# EAGLE board Si4707-Breakout-Panel-v11 (EAGLE 6.3), part 1 of 3
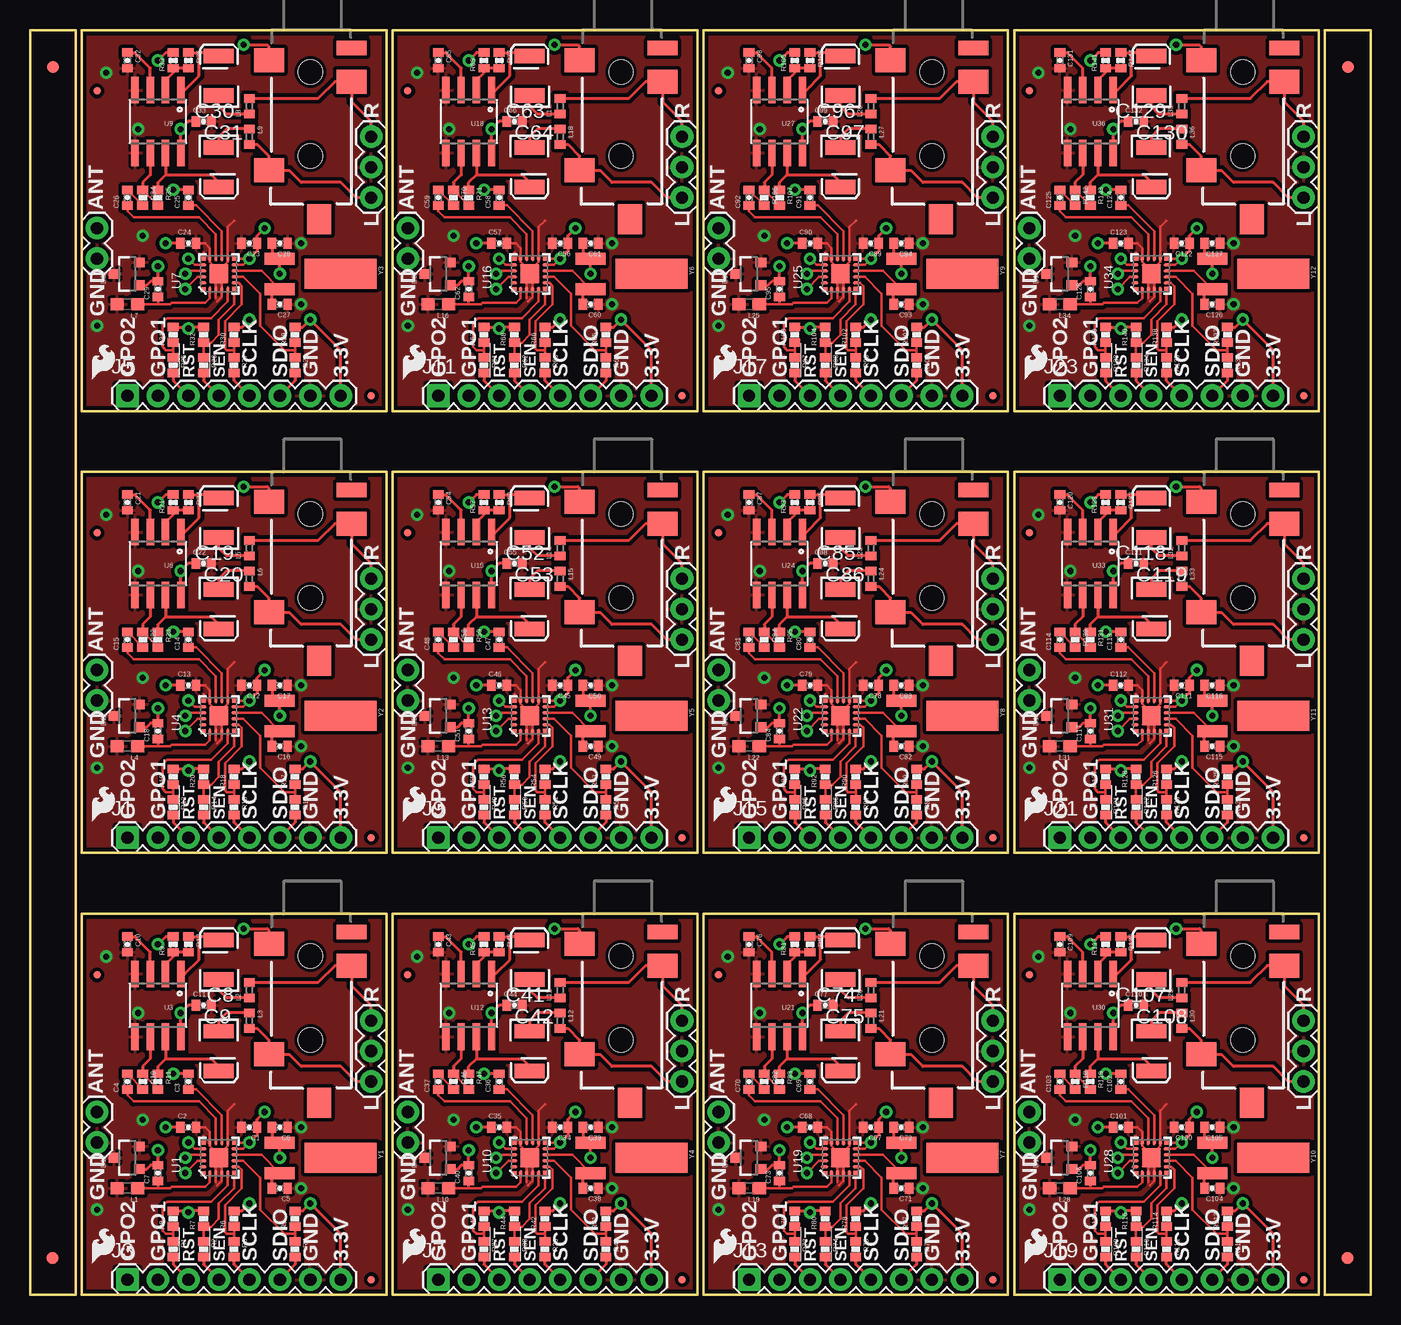
[diagram p0: board, top side]
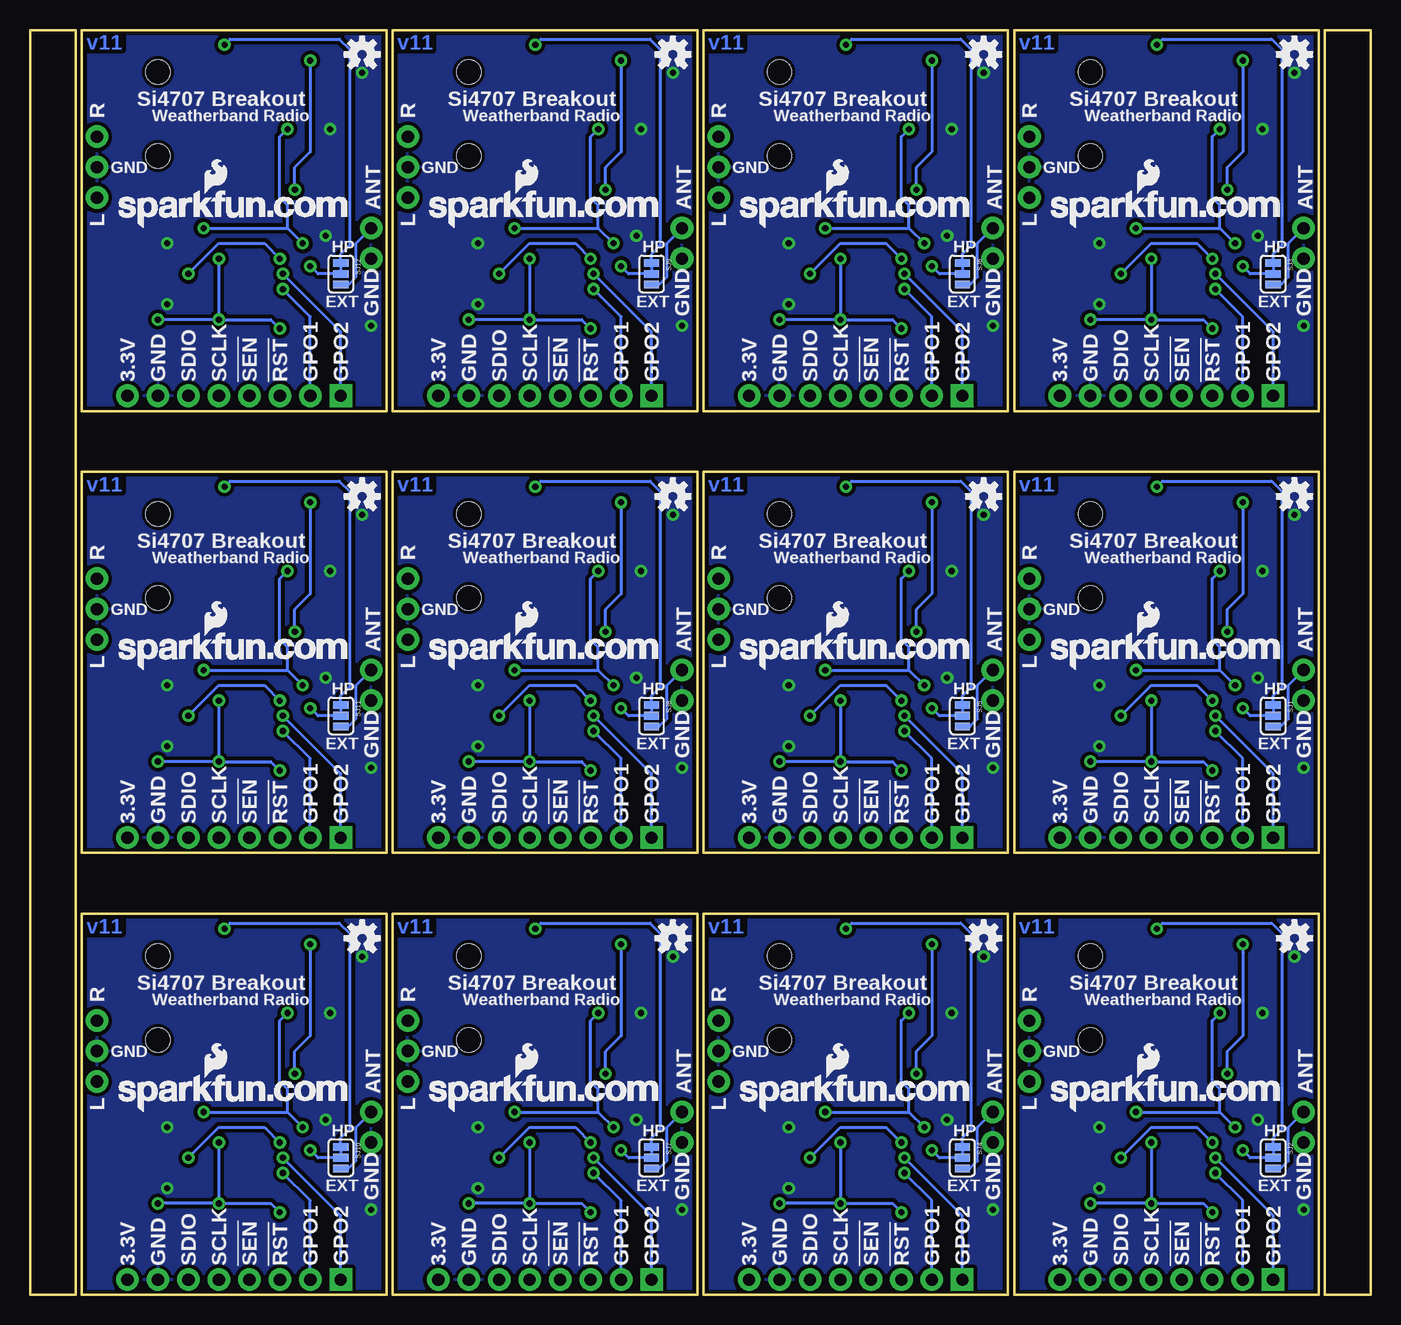
[diagram p1: board, bottom side, seen from below]

Size 111.76 x 105.41 mm. Coordinates in mm from the lower left corner, seen from the top.
Outline: 3.81,2.54 3.81,21.59
Outline: 3.81,21.59 3.81,88.9
Outline: 3.81,21.59 3.81,0 0,0 0,22.86
Outline: 0,102.87 0,83.82
Outline: 0,83.82 0,16.51
Outline: 0,83.82 0,105.41 3.81,105.41 3.81,82.55
Outline: 107.95,102.87 107.95,83.82
Outline: 107.95,83.82 107.95,16.51
Outline: 107.95,83.82 107.95,105.41 111.76,105.41 111.76,82.55
Outline: 111.76,2.54 111.76,21.59
Outline: 111.76,21.59 111.76,88.9
Outline: 111.76,21.59 111.76,0 107.95,0 107.95,22.86
Outline: 4.32,0 4.32,31.75 29.72,31.75 29.72,0 4.32,0
Outline: 4.32,36.83 4.32,68.58 29.72,68.58 29.72,36.83 4.32,36.83
Outline: 4.32,73.66 4.32,105.41 29.72,105.41 29.72,73.66 4.32,73.66
Outline: 30.23,0 30.23,31.75 55.63,31.75 55.63,0 30.23,0
Outline: 30.23,36.83 30.23,68.58 55.63,68.58 55.63,36.83 30.23,36.83
Outline: 30.23,73.66 30.23,105.41 55.63,105.41 55.63,73.66 30.23,73.66
Outline: 56.13,0 56.13,31.75 81.53,31.75 81.53,0 56.13,0
Outline: 56.13,36.83 56.13,68.58 81.53,68.58 81.53,36.83 56.13,36.83
Outline: 56.13,73.66 56.13,105.41 81.53,105.41 81.53,73.66 56.13,73.66
Outline: 82.04,0 82.04,31.75 107.44,31.75 107.44,0 82.04,0
Outline: 82.04,36.83 82.04,68.58 107.44,68.58 107.44,36.83 82.04,36.83
Outline: 82.04,73.66 82.04,105.41 107.44,105.41 107.44,73.66 82.04,73.66
Copper layers (1*16): Top 0.035mm / dielectric 1.5mm / Bottom 0.035mm
Design rules "default": minimum track width 8mil, minimum drill 20mil, track to track 8mil, track to pad 8mil, pad to pad 8mil, via to via 8mil, smd to smd 8mil, copper to edge 8mil, drill to drill 8mil, minimum pad ring 12mil, minimum via ring 10mil, stop-mask expansion 4mil, vias tented up to drill 20mil, thermal gap 10mil

## Footprints (pad centres in the part's own frame; a part is rotated, then mirrored left to right if it is on the bottom)
0402-CAP = smd 0.7 x 0.9: 1 -0.65,0; 2 0.65,0
EIA3528 = smd 1.2 x 2.5: A 1.65,0; C -1.65,0
SOT23-3 = smd 0.8 x 0.9: 1 -0.95,-1; 2 0.95,-1; 3 0,1.1
FIDUCIAL-1X2 = smd 1 x 1: 1 0,0
1X08 = drill 1.016 pad 1.88 square: 1 0,0 | drill 1.016 pad 1.88: 2 2.54,0; 3 5.08,0; 4 7.62,0; 5 10.16,0; 6 12.7,0; 7 15.24,0; 8 17.78,0
1X02 = drill 1.016 pad 1.88: 1 0,0; 2 2.54,0
1X03 = drill 1.016 pad 1.88: 1 0,0; 2 2.54,0; 3 5.08,0
MICRO-FIDUCIAL = smd 0.635 x 0.635: 1 0,0
0603 = smd 1.1 x 1: 1 -0.85,0; 2 0.85,0
C0402 = smd 0.7 x 0.9: 1 -0.65,0; 2 0.65,0
0402-RES = smd 0.7 x 0.9: 1 -0.65,0; 2 0.65,0
SJ_3 = smd 0.635 x 1.27: 1 -0.889,0; 2 0,0; 3 0.889,0
SI470X = smd 0.34 x 0.34: 1 -1.275,1.265; 6 -1.265,-1.265; 11 1.265,-1.265; 16 1.265,1.265 | smd 0.61 x 0.28: 2 -1.335,0.75; 3 -1.335,0.25; 4 -1.335,-0.25; 5 -1.335,-0.75; 12 1.335,-0.75; 13 1.335,-0.25; 14 1.335,0.25; 15 1.335,0.75 | smd 0.28 x 0.61: 7 -0.75,-1.335; 8 -0.25,-1.335; 9 0.25,-1.335; 10 0.75,-1.335; 17 0.75,1.335; 18 0.25,1.335; 19 -0.25,1.335; 20 -0.75,1.335 | smd 1.6 x 1.6: 21 0,0
AUDIO-JACK-3.5MM-SMD = smd 2 x 2.5: RING 4.3,3.45; SLEEVE 2.5,-3.45; TIP 11.7,-3.45 | smd 1.2 x 2.5: RSH 1.5,3.45 | smd 2.5 x 2: TSH 15.75,0.75 | hole 2: 3.5,0; 10.5,0
SPARKFUN_SO08 = smd 0.61 x 2.21: 1 -1.905,-2.616; 2 -0.635,-2.616; 3 0.635,-2.616; 4 1.905,-2.616; 5 1.905,2.616; 6 0.635,2.616; 7 -0.635,2.616; 8 -1.905,2.616
CRYSTAL-32KHZ-SMD = smd 2.5 x 6: SHEILD 0,5.08 | smd 1 x 2.5: X1 -1.27,0; X2 1.27,0

## Placement (x,y rotation side)
C1  22nF  [0402-CAP]  18.29,13.97 180 top
C2  0.1uF  [0402-CAP]  13.21,13.97 0 top
C3  0.39uF  [0402-CAP]  13.21,17.78 90 top
C4  0.39uF  [0402-CAP]  8.13,17.78 90 top
C5  22pF  [0402-CAP]  20.83,8.89 180 top
C6  22pF  [0402-CAP]  20.83,13.97 180 top
C7  1nF  [0402-CAP]  10.67,10.16 90 top
C8  47uF  [EIA3528]  15.75,27.94 90 top
C9  47uF  [EIA3528]  15.75,20.32 270 top
C10  0.1uF  [0402-CAP]  8.13,29.21 270 top
C11  0.1uF  [0402-CAP]  14.48,24.13 0 top
C12  22nF  [0402-CAP]  18.29,50.8 180 top
C13  0.1uF  [0402-CAP]  13.21,50.8 0 top
C14  0.39uF  [0402-CAP]  13.21,54.61 90 top
C15  0.39uF  [0402-CAP]  8.13,54.61 90 top
C16  22pF  [0402-CAP]  20.83,45.72 180 top
C17  22pF  [0402-CAP]  20.83,50.8 180 top
C18  1nF  [0402-CAP]  10.67,46.99 90 top
C19  47uF  [EIA3528]  15.75,64.77 90 top
C20  47uF  [EIA3528]  15.75,57.15 270 top
C21  0.1uF  [0402-CAP]  8.13,66.04 270 top
C22  0.1uF  [0402-CAP]  14.48,60.96 0 top
C23  22nF  [0402-CAP]  18.29,87.63 180 top
C24  0.1uF  [0402-CAP]  13.21,87.63 0 top
C25  0.39uF  [0402-CAP]  13.21,91.44 90 top
C26  0.39uF  [0402-CAP]  8.13,91.44 90 top
C27  22pF  [0402-CAP]  20.83,82.55 180 top
C28  22pF  [0402-CAP]  20.83,87.63 180 top
C29  1nF  [0402-CAP]  10.67,83.82 90 top
C30  47uF  [EIA3528]  15.75,101.6 90 top
C31  47uF  [EIA3528]  15.75,93.98 270 top
C32  0.1uF  [0402-CAP]  8.13,102.87 270 top
C33  0.1uF  [0402-CAP]  14.48,97.79 0 top
C34  22nF  [0402-CAP]  44.2,13.97 180 top
C35  0.1uF  [0402-CAP]  39.12,13.97 0 top
C36  0.39uF  [0402-CAP]  39.12,17.78 90 top
C37  0.39uF  [0402-CAP]  34.04,17.78 90 top
C38  22pF  [0402-CAP]  46.74,8.89 180 top
C39  22pF  [0402-CAP]  46.74,13.97 180 top
C40  1nF  [0402-CAP]  36.58,10.16 90 top
C41  47uF  [EIA3528]  41.66,27.94 90 top
C42  47uF  [EIA3528]  41.66,20.32 270 top
C43  0.1uF  [0402-CAP]  34.04,29.21 270 top
C44  0.1uF  [0402-CAP]  40.39,24.13 0 top
C45  22nF  [0402-CAP]  44.2,50.8 180 top
C46  0.1uF  [0402-CAP]  39.12,50.8 0 top
C47  0.39uF  [0402-CAP]  39.12,54.61 90 top
C48  0.39uF  [0402-CAP]  34.04,54.61 90 top
C49  22pF  [0402-CAP]  46.74,45.72 180 top
C50  22pF  [0402-CAP]  46.74,50.8 180 top
C51  1nF  [0402-CAP]  36.58,46.99 90 top
C52  47uF  [EIA3528]  41.66,64.77 90 top
C53  47uF  [EIA3528]  41.66,57.15 270 top
C54  0.1uF  [0402-CAP]  34.04,66.04 270 top
C55  0.1uF  [0402-CAP]  40.39,60.96 0 top
C56  22nF  [0402-CAP]  44.2,87.63 180 top
C57  0.1uF  [0402-CAP]  39.12,87.63 0 top
C58  0.39uF  [0402-CAP]  39.12,91.44 90 top
C59  0.39uF  [0402-CAP]  34.04,91.44 90 top
C60  22pF  [0402-CAP]  46.74,82.55 180 top
C61  22pF  [0402-CAP]  46.74,87.63 180 top
C62  1nF  [0402-CAP]  36.58,83.82 90 top
C63  47uF  [EIA3528]  41.66,101.6 90 top
C64  47uF  [EIA3528]  41.66,93.98 270 top
C65  0.1uF  [0402-CAP]  34.04,102.87 270 top
C66  0.1uF  [0402-CAP]  40.39,97.79 0 top
C67  22nF  [0402-CAP]  70.1,13.97 180 top
C68  0.1uF  [0402-CAP]  65.02,13.97 0 top
C69  0.39uF  [0402-CAP]  65.02,17.78 90 top
C70  0.39uF  [0402-CAP]  59.94,17.78 90 top
C71  22pF  [0402-CAP]  72.64,8.89 180 top
C72  22pF  [0402-CAP]  72.64,13.97 180 top
C73  1nF  [0402-CAP]  62.48,10.16 90 top
C74  47uF  [EIA3528]  67.56,27.94 90 top
C75  47uF  [EIA3528]  67.56,20.32 270 top
C76  0.1uF  [0402-CAP]  59.94,29.21 270 top
C77  0.1uF  [0402-CAP]  66.29,24.13 0 top
C78  22nF  [0402-CAP]  70.1,50.8 180 top
C79  0.1uF  [0402-CAP]  65.02,50.8 0 top
C80  0.39uF  [0402-CAP]  65.02,54.61 90 top
C81  0.39uF  [0402-CAP]  59.94,54.61 90 top
C82  22pF  [0402-CAP]  72.64,45.72 180 top
C83  22pF  [0402-CAP]  72.64,50.8 180 top
C84  1nF  [0402-CAP]  62.48,46.99 90 top
C85  47uF  [EIA3528]  67.56,64.77 90 top
C86  47uF  [EIA3528]  67.56,57.15 270 top
C87  0.1uF  [0402-CAP]  59.94,66.04 270 top
C88  0.1uF  [0402-CAP]  66.29,60.96 0 top
C89  22nF  [0402-CAP]  70.1,87.63 180 top
C90  0.1uF  [0402-CAP]  65.02,87.63 0 top
C91  0.39uF  [0402-CAP]  65.02,91.44 90 top
C92  0.39uF  [0402-CAP]  59.94,91.44 90 top
C93  22pF  [0402-CAP]  72.64,82.55 180 top
C94  22pF  [0402-CAP]  72.64,87.63 180 top
C95  1nF  [0402-CAP]  62.48,83.82 90 top
C96  47uF  [EIA3528]  67.56,101.6 90 top
C97  47uF  [EIA3528]  67.56,93.98 270 top
C98  0.1uF  [0402-CAP]  59.94,102.87 270 top
C99  0.1uF  [0402-CAP]  66.29,97.79 0 top
C100  22nF  [0402-CAP]  96.01,13.97 180 top
C101  0.1uF  [0402-CAP]  90.93,13.97 0 top
C102  0.39uF  [0402-CAP]  90.93,17.78 90 top
C103  0.39uF  [0402-CAP]  85.85,17.78 90 top
C104  22pF  [0402-CAP]  98.55,8.89 180 top
C105  22pF  [0402-CAP]  98.55,13.97 180 top
C106  1nF  [0402-CAP]  88.39,10.16 90 top
C107  47uF  [EIA3528]  93.47,27.94 90 top
C108  47uF  [EIA3528]  93.47,20.32 270 top
C109  0.1uF  [0402-CAP]  85.85,29.21 270 top
C110  0.1uF  [0402-CAP]  92.2,24.13 0 top
C111  22nF  [0402-CAP]  96.01,50.8 180 top
C112  0.1uF  [0402-CAP]  90.93,50.8 0 top
C113  0.39uF  [0402-CAP]  90.93,54.61 90 top
C114  0.39uF  [0402-CAP]  85.85,54.61 90 top
C115  22pF  [0402-CAP]  98.55,45.72 180 top
C116  22pF  [0402-CAP]  98.55,50.8 180 top
C117  1nF  [0402-CAP]  88.39,46.99 90 top
C118  47uF  [EIA3528]  93.47,64.77 90 top
C119  47uF  [EIA3528]  93.47,57.15 270 top
C120  0.1uF  [0402-CAP]  85.85,66.04 270 top
C121  0.1uF  [0402-CAP]  92.2,60.96 0 top
C122  22nF  [0402-CAP]  96.01,87.63 180 top
C123  0.1uF  [0402-CAP]  90.93,87.63 0 top
C124  0.39uF  [0402-CAP]  90.93,91.44 90 top
C125  0.39uF  [0402-CAP]  85.85,91.44 90 top
C126  22pF  [0402-CAP]  98.55,82.55 180 top
C127  22pF  [0402-CAP]  98.55,87.63 180 top
C128  1nF  [0402-CAP]  88.39,83.82 90 top
C129  47uF  [EIA3528]  93.47,101.6 90 top
C130  47uF  [EIA3528]  93.47,93.98 270 top
C131  0.1uF  [0402-CAP]  85.85,102.87 270 top
C132  0.1uF  [0402-CAP]  92.2,97.79 0 top
D1  CM1213  [SOT23-3]  8.13,11.43 90 top
D2  CM1213  [SOT23-3]  8.13,48.26 90 top
D3  CM1213  [SOT23-3]  8.13,85.09 90 top
D4  CM1213  [SOT23-3]  34.04,11.43 90 top
D5  CM1213  [SOT23-3]  34.04,48.26 90 top
D6  CM1213  [SOT23-3]  34.04,85.09 90 top
D7  CM1213  [SOT23-3]  59.94,11.43 90 top
D8  CM1213  [SOT23-3]  59.94,48.26 90 top
D9  CM1213  [SOT23-3]  59.94,85.09 90 top
D10  CM1213  [SOT23-3]  85.85,11.43 90 top
D11  CM1213  [SOT23-3]  85.85,48.26 90 top
D12  CM1213  [SOT23-3]  85.85,85.09 90 top
E$1  [FIDUCIAL-1X2]  1.93,102.34 0 top
E$2  [FIDUCIAL-1X2]  1.88,3.07 180 top
E$3  [FIDUCIAL-1X2]  109.88,102.34 0 top
E$4  [FIDUCIAL-1X2]  109.83,3.07 180 top
J1  OUTPUT  [1X08]  8.13,38.1 0 top
J2  ANT  [1X02]  5.59,49.53 90 top
J3  OUTPUT  [1X08]  8.13,1.27 0 top
J4  ANT  [1X02]  5.59,12.7 90 top
J5  OUTPUT  [1X08]  8.13,74.93 0 top
J6  ANT  [1X02]  5.59,86.36 90 top
J7  OUTPUT  [1X08]  34.04,1.27 0 top
J8  ANT  [1X02]  31.5,12.7 90 top
J9  OUTPUT  [1X08]  34.04,38.1 0 top
J10  ANT  [1X02]  31.5,49.53 90 top
J11  OUTPUT  [1X08]  34.04,74.93 0 top
J12  ANT  [1X02]  31.5,86.36 90 top
J13  OUTPUT  [1X08]  59.94,1.27 0 top
J14  ANT  [1X02]  57.4,12.7 90 top
J15  OUTPUT  [1X08]  59.94,38.1 0 top
J16  ANT  [1X02]  57.4,49.53 90 top
J17  OUTPUT  [1X08]  59.94,74.93 0 top
J18  ANT  [1X02]  57.4,86.36 90 top
J19  OUTPUT  [1X08]  85.85,1.27 0 top
J20  ANT  [1X02]  83.31,12.7 90 top
J21  OUTPUT  [1X08]  85.85,38.1 0 top
J22  ANT  [1X02]  83.31,49.53 90 top
J23  OUTPUT  [1X08]  85.85,74.93 0 top
J24  ANT  [1X02]  83.31,86.36 90 top
JP1  LOGO-SFENEW  [SFE-NEW-WEBLOGO]  26.67,15.24 0 bottom
JP2  LOGO-SFESK  [SFE-LOGO-FLAME]  5.21,2.67 0 top
JP3  [1X03]  28.45,22.86 270 top
JP4  FIDUCIALUFIDUCIAL  [MICRO-FIDUCIAL]  28.45,1.27 0 top
JP5  FIDUCIALUFIDUCIAL  [MICRO-FIDUCIAL]  5.59,26.67 0 top
JP6  LOGO-SFENEW  [SFE-NEW-WEBLOGO]  26.67,52.07 0 bottom
JP7  LOGO-SFESK  [SFE-LOGO-FLAME]  5.21,39.5 0 top
JP8  [1X03]  28.45,59.69 270 top
JP9  FIDUCIALUFIDUCIAL  [MICRO-FIDUCIAL]  28.45,38.1 0 top
JP10  FIDUCIALUFIDUCIAL  [MICRO-FIDUCIAL]  5.59,63.5 0 top
JP11  LOGO-SFENEW  [SFE-NEW-WEBLOGO]  26.67,88.9 0 bottom
JP12  LOGO-SFESK  [SFE-LOGO-FLAME]  5.21,76.33 0 top
JP13  [1X03]  28.45,96.52 270 top
JP14  FIDUCIALUFIDUCIAL  [MICRO-FIDUCIAL]  28.45,74.93 0 top
JP15  FIDUCIALUFIDUCIAL  [MICRO-FIDUCIAL]  5.59,100.33 0 top
JP16  LOGO-SFENEW  [SFE-NEW-WEBLOGO]  52.58,15.24 0 bottom
JP17  LOGO-SFESK  [SFE-LOGO-FLAME]  31.12,2.67 0 top
JP18  [1X03]  54.36,22.86 270 top
JP19  FIDUCIALUFIDUCIAL  [MICRO-FIDUCIAL]  54.36,1.27 0 top
JP20  FIDUCIALUFIDUCIAL  [MICRO-FIDUCIAL]  31.5,26.67 0 top
JP21  LOGO-SFENEW  [SFE-NEW-WEBLOGO]  52.58,52.07 0 bottom
JP22  LOGO-SFESK  [SFE-LOGO-FLAME]  31.12,39.5 0 top
JP23  [1X03]  54.36,59.69 270 top
JP24  FIDUCIALUFIDUCIAL  [MICRO-FIDUCIAL]  54.36,38.1 0 top
JP25  FIDUCIALUFIDUCIAL  [MICRO-FIDUCIAL]  31.5,63.5 0 top
JP26  LOGO-SFENEW  [SFE-NEW-WEBLOGO]  52.58,88.9 0 bottom
JP27  LOGO-SFESK  [SFE-LOGO-FLAME]  31.12,76.33 0 top
JP28  [1X03]  54.36,96.52 270 top
JP29  FIDUCIALUFIDUCIAL  [MICRO-FIDUCIAL]  54.36,74.93 0 top
JP30  FIDUCIALUFIDUCIAL  [MICRO-FIDUCIAL]  31.5,100.33 0 top
JP31  LOGO-SFENEW  [SFE-NEW-WEBLOGO]  78.49,15.24 0 bottom
JP32  LOGO-SFESK  [SFE-LOGO-FLAME]  57.02,2.67 0 top
JP33  [1X03]  80.26,22.86 270 top
JP34  FIDUCIALUFIDUCIAL  [MICRO-FIDUCIAL]  80.26,1.27 0 top
JP35  FIDUCIALUFIDUCIAL  [MICRO-FIDUCIAL]  57.4,26.67 0 top
JP36  LOGO-SFENEW  [SFE-NEW-WEBLOGO]  78.49,52.07 0 bottom
JP37  LOGO-SFESK  [SFE-LOGO-FLAME]  57.02,39.5 0 top
JP38  [1X03]  80.26,59.69 270 top
JP39  FIDUCIALUFIDUCIAL  [MICRO-FIDUCIAL]  80.26,38.1 0 top
JP40  FIDUCIALUFIDUCIAL  [MICRO-FIDUCIAL]  57.4,63.5 0 top
JP41  LOGO-SFENEW  [SFE-NEW-WEBLOGO]  78.49,88.9 0 bottom
JP42  LOGO-SFESK  [SFE-LOGO-FLAME]  57.02,76.33 0 top
JP43  [1X03]  80.26,96.52 270 top
JP44  FIDUCIALUFIDUCIAL  [MICRO-FIDUCIAL]  80.26,74.93 0 top
JP45  FIDUCIALUFIDUCIAL  [MICRO-FIDUCIAL]  57.4,100.33 0 top
JP46  LOGO-SFENEW  [SFE-NEW-WEBLOGO]  104.39,15.24 0 bottom
JP47  LOGO-SFESK  [SFE-LOGO-FLAME]  82.93,2.67 0 top
JP48  [1X03]  106.17,22.86 270 top
JP49  FIDUCIALUFIDUCIAL  [MICRO-FIDUCIAL]  106.17,1.27 0 top
JP50  FIDUCIALUFIDUCIAL  [MICRO-FIDUCIAL]  83.31,26.67 0 top
JP51  LOGO-SFENEW  [SFE-NEW-WEBLOGO]  104.39,52.07 0 bottom
JP52  LOGO-SFESK  [SFE-LOGO-FLAME]  82.93,39.5 0 top
JP53  [1X03]  106.17,59.69 270 top
JP54  FIDUCIALUFIDUCIAL  [MICRO-FIDUCIAL]  106.17,38.1 0 top
JP55  FIDUCIALUFIDUCIAL  [MICRO-FIDUCIAL]  83.31,63.5 0 top
JP56  LOGO-SFENEW  [SFE-NEW-WEBLOGO]  104.39,88.9 0 bottom
JP57  LOGO-SFESK  [SFE-LOGO-FLAME]  82.93,76.33 0 top
JP58  [1X03]  106.17,96.52 270 top
JP59  FIDUCIALUFIDUCIAL  [MICRO-FIDUCIAL]  106.17,74.93 0 top
JP60  FIDUCIALUFIDUCIAL  [MICRO-FIDUCIAL]  83.31,100.33 0 top
L1  56nH  [0603]  8.13,8.89 180 top
L2  Ferrite 2.5k  [C0402]  18.29,25.4 90 top
L3  Ferrite 2.5k  [C0402]  18.29,22.86 270 top
L4  56nH  [0603]  8.13,45.72 180 top
L5  Ferrite 2.5k  [C0402]  18.29,62.23 90 top
L6  Ferrite 2.5k  [C0402]  18.29,59.69 270 top
L7  56nH  [0603]  8.13,82.55 180 top
L8  Ferrite 2.5k  [C0402]  18.29,99.06 90 top
L9  Ferrite 2.5k  [C0402]  18.29,96.52 270 top
L10  56nH  [0603]  34.04,8.89 180 top
L11  Ferrite 2.5k  [C0402]  44.2,25.4 90 top
L12  Ferrite 2.5k  [C0402]  44.2,22.86 270 top
L13  56nH  [0603]  34.04,45.72 180 top
L14  Ferrite 2.5k  [C0402]  44.2,62.23 90 top
L15  Ferrite 2.5k  [C0402]  44.2,59.69 270 top
L16  56nH  [0603]  34.04,82.55 180 top
L17  Ferrite 2.5k  [C0402]  44.2,99.06 90 top
L18  Ferrite 2.5k  [C0402]  44.2,96.52 270 top
L19  56nH  [0603]  59.94,8.89 180 top
L20  Ferrite 2.5k  [C0402]  70.1,25.4 90 top
L21  Ferrite 2.5k  [C0402]  70.1,22.86 270 top
L22  56nH  [0603]  59.94,45.72 180 top
L23  Ferrite 2.5k  [C0402]  70.1,62.23 90 top
L24  Ferrite 2.5k  [C0402]  70.1,59.69 270 top
L25  56nH  [0603]  59.94,82.55 180 top
L26  Ferrite 2.5k  [C0402]  70.1,99.06 90 top
L27  Ferrite 2.5k  [C0402]  70.1,96.52 270 top
L28  56nH  [0603]  85.85,8.89 180 top
L29  Ferrite 2.5k  [C0402]  96.01,25.4 90 top
L30  Ferrite 2.5k  [C0402]  96.01,22.86 270 top
L31  56nH  [0603]  85.85,45.72 180 top
L32  Ferrite 2.5k  [C0402]  96.01,62.23 90 top
L33  Ferrite 2.5k  [C0402]  96.01,59.69 270 top
L34  56nH  [0603]  85.85,82.55 180 top
L35  Ferrite 2.5k  [C0402]  96.01,99.06 90 top
L36  Ferrite 2.5k  [C0402]  96.01,96.52 270 top
R1  2k  [0402-RES]  11.94,3.81 270 top
R2  2k  [0402-RES]  14.48,3.81 270 top
R3  2k  [0402-RES]  17.02,3.81 270 top
R4  2k  [0402-RES]  22.1,3.81 270 top
R5  4.7k  [0402-RES]  22.1,6.35 90 top
R6  4.7k  [0402-RES]  17.02,6.35 90 top
R7  10k  [0402-RES]  14.48,6.35 90 top
R8  10k  [0402-RES]  11.94,6.35 90 top
R9  20k  [0402-RES]  11.94,29.21 90 top
R10  20k  [0402-RES]  9.4,17.78 270 top
R11  47k  [0402-RES]  10.67,17.78 270 top
R12  47k  [0402-RES]  13.21,29.21 270 top
R13  2k  [0402-RES]  11.94,40.64 270 top
R14  2k  [0402-RES]  14.48,40.64 270 top
R15  2k  [0402-RES]  17.02,40.64 270 top
R16  2k  [0402-RES]  22.1,40.64 270 top
R17  4.7k  [0402-RES]  22.1,43.18 90 top
R18  4.7k  [0402-RES]  17.02,43.18 90 top
R19  10k  [0402-RES]  11.94,43.18 90 top
R20  10k  [0402-RES]  14.48,43.18 90 top
R21  20k  [0402-RES]  11.94,66.04 90 top
R22  20k  [0402-RES]  9.4,54.61 270 top
R23  47k  [0402-RES]  10.67,54.61 270 top
R24  47k  [0402-RES]  13.21,66.04 270 top
R25  2k  [0402-RES]  11.94,77.47 270 top
R26  2k  [0402-RES]  14.48,77.47 270 top
R27  2k  [0402-RES]  17.02,77.47 270 top
R28  2k  [0402-RES]  22.1,77.47 270 top
R29  4.7k  [0402-RES]  22.1,80.01 90 top
R30  4.7k  [0402-RES]  17.02,80.01 90 top
R31  10k  [0402-RES]  11.94,80.01 90 top
R32  10k  [0402-RES]  14.48,80.01 90 top
R33  20k  [0402-RES]  11.94,102.87 90 top
R34  20k  [0402-RES]  9.4,91.44 270 top
R35  47k  [0402-RES]  10.67,91.44 270 top
R36  47k  [0402-RES]  13.21,102.87 270 top
R37  2k  [0402-RES]  37.85,3.81 270 top
R38  2k  [0402-RES]  40.39,3.81 270 top
R39  2k  [0402-RES]  42.93,3.81 270 top
R40  2k  [0402-RES]  48.01,3.81 270 top
R41  4.7k  [0402-RES]  48.01,6.35 90 top
R42  4.7k  [0402-RES]  42.93,6.35 90 top
R43  10k  [0402-RES]  37.85,6.35 90 top
R44  10k  [0402-RES]  40.39,6.35 90 top
R45  20k  [0402-RES]  37.85,29.21 90 top
R46  20k  [0402-RES]  35.31,17.78 270 top
R47  47k  [0402-RES]  36.58,17.78 270 top
R48  47k  [0402-RES]  39.12,29.21 270 top
R49  2k  [0402-RES]  37.85,40.64 270 top
R50  2k  [0402-RES]  40.39,40.64 270 top
R51  2k  [0402-RES]  42.93,40.64 270 top
R52  2k  [0402-RES]  48.01,40.64 270 top
R53  4.7k  [0402-RES]  48.01,43.18 90 top
R54  4.7k  [0402-RES]  42.93,43.18 90 top
R55  10k  [0402-RES]  37.85,43.18 90 top
R56  10k  [0402-RES]  40.39,43.18 90 top
R57  20k  [0402-RES]  37.85,66.04 90 top
R58  20k  [0402-RES]  35.31,54.61 270 top
R59  47k  [0402-RES]  36.58,54.61 270 top
R60  47k  [0402-RES]  39.12,66.04 270 top
R61  2k  [0402-RES]  37.85,77.47 270 top
R62  2k  [0402-RES]  40.39,77.47 270 top
R63  2k  [0402-RES]  42.93,77.47 270 top
R64  2k  [0402-RES]  48.01,77.47 270 top
R65  4.7k  [0402-RES]  48.01,80.01 90 top
R66  4.7k  [0402-RES]  42.93,80.01 90 top
R67  10k  [0402-RES]  37.85,80.01 90 top
R68  10k  [0402-RES]  40.39,80.01 90 top
R69  20k  [0402-RES]  37.85,102.87 90 top
R70  20k  [0402-RES]  35.31,91.44 270 top
R71  47k  [0402-RES]  36.58,91.44 270 top
R72  47k  [0402-RES]  39.12,102.87 270 top
R73  2k  [0402-RES]  63.75,3.81 270 top
R74  2k  [0402-RES]  66.29,3.81 270 top
R75  2k  [0402-RES]  68.83,3.81 270 top
R76  2k  [0402-RES]  73.91,3.81 270 top
R77  4.7k  [0402-RES]  73.91,6.35 90 top
R78  4.7k  [0402-RES]  68.83,6.35 90 top
R79  10k  [0402-RES]  63.75,6.35 90 top
R80  10k  [0402-RES]  66.29,6.35 90 top
R81  20k  [0402-RES]  63.75,29.21 90 top
R82  20k  [0402-RES]  61.21,17.78 270 top
R83  47k  [0402-RES]  62.48,17.78 270 top
R84  47k  [0402-RES]  65.02,29.21 270 top
R85  2k  [0402-RES]  63.75,40.64 270 top
R86  2k  [0402-RES]  66.29,40.64 270 top
R87  2k  [0402-RES]  68.83,40.64 270 top
R88  2k  [0402-RES]  73.91,40.64 270 top
R89  4.7k  [0402-RES]  73.91,43.18 90 top
R90  4.7k  [0402-RES]  68.83,43.18 90 top
R91  10k  [0402-RES]  63.75,43.18 90 top
R92  10k  [0402-RES]  66.29,43.18 90 top
R93  20k  [0402-RES]  63.75,66.04 90 top
R94  20k  [0402-RES]  61.21,54.61 270 top
R95  47k  [0402-RES]  62.48,54.61 270 top
R96  47k  [0402-RES]  65.02,66.04 270 top
R97  2k  [0402-RES]  63.75,77.47 270 top
R98  2k  [0402-RES]  66.29,77.47 270 top
R99  2k  [0402-RES]  68.83,77.47 270 top
R100  2k  [0402-RES]  73.91,77.47 270 top
R101  4.7k  [0402-RES]  73.91,80.01 90 top
R102  4.7k  [0402-RES]  68.83,80.01 90 top
R103  10k  [0402-RES]  63.75,80.01 90 top
R104  10k  [0402-RES]  66.29,80.01 90 top
R105  20k  [0402-RES]  63.75,102.87 90 top
R106  20k  [0402-RES]  61.21,91.44 270 top
R107  47k  [0402-RES]  62.48,91.44 270 top
R108  47k  [0402-RES]  65.02,102.87 270 top
R109  2k  [0402-RES]  89.66,3.81 270 top
R110  2k  [0402-RES]  92.2,3.81 270 top
R111  2k  [0402-RES]  94.74,3.81 270 top
R112  2k  [0402-RES]  99.82,3.81 270 top
R113  4.7k  [0402-RES]  99.82,6.35 90 top
R114  4.7k  [0402-RES]  94.74,6.35 90 top
R115  10k  [0402-RES]  89.66,6.35 90 top
R116  10k  [0402-RES]  92.2,6.35 90 top
R117  20k  [0402-RES]  89.66,29.21 90 top
R118  20k  [0402-RES]  87.12,17.78 270 top
R119  47k  [0402-RES]  88.39,17.78 270 top
R120  47k  [0402-RES]  90.93,29.21 270 top
R121  2k  [0402-RES]  89.66,40.64 270 top
R122  2k  [0402-RES]  92.2,40.64 270 top
R123  2k  [0402-RES]  94.74,40.64 270 top
R124  2k  [0402-RES]  99.82,40.64 270 top
R125  4.7k  [0402-RES]  99.82,43.18 90 top
R126  4.7k  [0402-RES]  94.74,43.18 90 top
R127  10k  [0402-RES]  89.66,43.18 90 top
R128  10k  [0402-RES]  92.2,43.18 90 top
R129  20k  [0402-RES]  89.66,66.04 90 top
R130  20k  [0402-RES]  87.12,54.61 270 top
R131  47k  [0402-RES]  88.39,54.61 270 top
R132  47k  [0402-RES]  90.93,66.04 270 top
R133  2k  [0402-RES]  89.66,77.47 270 top
R134  2k  [0402-RES]  92.2,77.47 270 top
R135  2k  [0402-RES]  94.74,77.47 270 top
R136  2k  [0402-RES]  99.82,77.47 270 top
R137  4.7k  [0402-RES]  99.82,80.01 90 top
R138  4.7k  [0402-RES]  94.74,80.01 90 top
R139  10k  [0402-RES]  89.66,80.01 90 top
R140  10k  [0402-RES]  92.2,80.01 90 top
R141  20k  [0402-RES]  89.66,102.87 90 top
R142  20k  [0402-RES]  87.12,91.44 270 top
R143  47k  [0402-RES]  88.39,91.44 270 top
R144  47k  [0402-RES]  90.93,102.87 270 top
SJ1  [SJ_3]  8.13,48.26 270 bottom
SJ2  [SJ_3]  8.13,11.43 270 bottom
SJ3  [SJ_3]  8.13,85.09 270 bottom
SJ4  [SJ_3]  34.04,11.43 270 bottom
SJ5  [SJ_3]  34.04,48.26 270 bottom
SJ6  [SJ_3]  34.04,85.09 270 bottom
SJ7  [SJ_3]  59.94,11.43 270 bottom
SJ8  [SJ_3]  59.94,48.26 270 bottom
SJ9  [SJ_3]  59.94,85.09 270 bottom
SJ10  [SJ_3]  85.85,11.43 270 bottom
SJ11  [SJ_3]  85.85,48.26 270 bottom
SJ12  [SJ_3]  85.85,85.09 270 bottom
U1  [SI470X]  15.75,11.43 90 top
U2  [AUDIO-JACK-3.5MM-SMD]  23.37,31.75 270 top
U3  TPA6111  [SPARKFUN_SO08]  10.67,24.13 180 top
U4  [SI470X]  15.75,48.26 90 top
U5  [AUDIO-JACK-3.5MM-SMD]  23.37,68.58 270 top
U6  TPA6111  [SPARKFUN_SO08]  10.67,60.96 180 top
U7  [SI470X]  15.75,85.09 90 top
U8  [AUDIO-JACK-3.5MM-SMD]  23.37,105.41 270 top
U9  TPA6111  [SPARKFUN_SO08]  10.67,97.79 180 top
U10  [SI470X]  41.66,11.43 90 top
U11  [AUDIO-JACK-3.5MM-SMD]  49.28,31.75 270 top
U12  TPA6111  [SPARKFUN_SO08]  36.58,24.13 180 top
U13  [SI470X]  41.66,48.26 90 top
U14  [AUDIO-JACK-3.5MM-SMD]  49.28,68.58 270 top
U15  TPA6111  [SPARKFUN_SO08]  36.58,60.96 180 top
U16  [SI470X]  41.66,85.09 90 top
U17  [AUDIO-JACK-3.5MM-SMD]  49.28,105.41 270 top
U18  TPA6111  [SPARKFUN_SO08]  36.58,97.79 180 top
U19  [SI470X]  67.56,11.43 90 top
U20  [AUDIO-JACK-3.5MM-SMD]  75.18,31.75 270 top
U21  TPA6111  [SPARKFUN_SO08]  62.48,24.13 180 top
U22  [SI470X]  67.56,48.26 90 top
U23  [AUDIO-JACK-3.5MM-SMD]  75.18,68.58 270 top
U24  TPA6111  [SPARKFUN_SO08]  62.48,60.96 180 top
U25  [SI470X]  67.56,85.09 90 top
U26  [AUDIO-JACK-3.5MM-SMD]  75.18,105.41 270 top
U27  TPA6111  [SPARKFUN_SO08]  62.48,97.79 180 top
U28  [SI470X]  93.47,11.43 90 top
U29  [AUDIO-JACK-3.5MM-SMD]  101.09,31.75 270 top
U30  TPA6111  [SPARKFUN_SO08]  88.39,24.13 180 top
U31  [SI470X]  93.47,48.26 90 top
U32  [AUDIO-JACK-3.5MM-SMD]  101.09,68.58 270 top
U33  TPA6111  [SPARKFUN_SO08]  88.39,60.96 180 top
U34  [SI470X]  93.47,85.09 90 top
U35  [AUDIO-JACK-3.5MM-SMD]  101.09,105.41 270 top
U36  TPA6111  [SPARKFUN_SO08]  88.39,97.79 180 top
U$1  OSHW-LOGOS  [OSHW-LOGO-S]  6.35,66.55 0 bottom
U$2  OSHW-LOGOS  [OSHW-LOGO-S]  6.35,29.72 0 bottom
U$3  OSHW-LOGOS  [OSHW-LOGO-S]  6.35,103.38 0 bottom
U$4  OSHW-LOGOS  [OSHW-LOGO-S]  32.26,29.72 0 bottom
U$5  OSHW-LOGOS  [OSHW-LOGO-S]  32.26,66.55 0 bottom
U$6  OSHW-LOGOS  [OSHW-LOGO-S]  32.26,103.38 0 bottom
U$7  OSHW-LOGOS  [OSHW-LOGO-S]  58.17,29.72 0 bottom
U$8  OSHW-LOGOS  [OSHW-LOGO-S]  58.17,66.55 0 bottom
U$9  OSHW-LOGOS  [OSHW-LOGO-S]  58.17,103.38 0 bottom
U$10  OSHW-LOGOS  [OSHW-LOGO-S]  84.07,29.72 0 bottom
U$11  OSHW-LOGOS  [OSHW-LOGO-S]  84.07,66.55 0 bottom
U$12  OSHW-LOGOS  [OSHW-LOGO-S]  84.07,103.38 0 bottom
Y1  32.768kHz  [CRYSTAL-32KHZ-SMD]  20.83,11.43 270 top
Y2  32.768kHz  [CRYSTAL-32KHZ-SMD]  20.83,48.26 270 top
Y3  32.768kHz  [CRYSTAL-32KHZ-SMD]  20.83,85.09 270 top
Y4  32.768kHz  [CRYSTAL-32KHZ-SMD]  46.74,11.43 270 top
Y5  32.768kHz  [CRYSTAL-32KHZ-SMD]  46.74,48.26 270 top
Y6  32.768kHz  [CRYSTAL-32KHZ-SMD]  46.74,85.09 270 top
Y7  32.768kHz  [CRYSTAL-32KHZ-SMD]  72.64,11.43 270 top
Y8  32.768kHz  [CRYSTAL-32KHZ-SMD]  72.64,48.26 270 top
Y9  32.768kHz  [CRYSTAL-32KHZ-SMD]  72.64,85.09 270 top
Y10  32.768kHz  [CRYSTAL-32KHZ-SMD]  98.55,11.43 270 top
Y11  32.768kHz  [CRYSTAL-32KHZ-SMD]  98.55,48.26 270 top
Y12  32.768kHz  [CRYSTAL-32KHZ-SMD]  98.55,85.09 270 top

## Library data of the parts
C1-C132 L1-L36 R1-R144 SJ1-SJ12 = SparkFun-Passives
D1-D12 = SparkFun-DiscreteSemi
E$1-E$4 JP1 JP2 JP4-JP7 JP9-JP12 JP14-JP17 JP19-JP22 JP24-JP27 JP29-JP32 JP34-JP37 JP39-JP42 JP44-JP47 JP49-JP52 JP54-JP57 JP59 JP60 = SparkFun
J1-J24 JP3 JP8 JP13 JP18 JP23 JP28 JP33 JP38 JP43 JP48 JP53 JP58 U2 U5 U8 U11 U14 U17 U20 U23 U26 U29 U32 U35 = SparkFun-Connectors
U1 U4 U7 U10 U13 U16 U19 U22 U25 U28 U31 U34 = SparkFun-RF
U3 U6 U9 U12 U15 U18 U21 U24 U27 U30 U33 U36 = SparkFun-DigitalIC
U$1-U$12 = SparkFun-Aesthetics
Y1-Y12 = SparkFun-FreqCtrl

## Nets
3.3V: C1.1 C2.1 C11.1 J3.8 R5.2 R6.2 R7.2 R8.2 U1.10 U1.11 U3.8
3.3V1: C12.1 C13.1 C22.1 J1.8 R17.2 R18.2 R19.2 R20.2 U4.10 U4.11 U6.8
3.3V2: C23.1 C24.1 C33.1 J5.8 R29.2 R30.2 R31.2 R32.2 U7.10 U7.11 U9.8
3.3V3: C34.1 C35.1 C44.1 J7.8 R41.2 R42.2 R43.2 R44.2 U10.10 U10.11 U12.8
3.3V4: C45.1 C46.1 C55.1 J9.8 R53.2 R54.2 R55.2 R56.2 U13.10 U13.11 U15.8
3.3V5: C56.1 C57.1 C66.1 J11.8 R65.2 R66.2 R67.2 R68.2 U16.10 U16.11 U18.8
3.3V6: C67.1 C68.1 C77.1 J13.8 R77.2 R78.2 R79.2 R80.2 U19.10 U19.11 U21.8
3.3V7: C78.1 C79.1 C88.1 J15.8 R89.2 R90.2 R91.2 R92.2 U22.10 U22.11 U24.8
3.3V8: C89.1 C90.1 C99.1 J17.8 R101.2 R102.2 R103.2 R104.2 U25.10 U25.11 U27.8
3.3V9: C100.1 C101.1 C110.1 J19.8 R113.2 R114.2 R115.2 R116.2 U28.10 U28.11 U30.8
3.3V10: C111.1 C112.1 C121.1 J21.8 R125.2 R126.2 R127.2 R128.2 U31.10 U31.11 U33.8
3.3V11: C122.1 C123.1 C132.1 J23.8 R137.2 R138.2 R139.2 R140.2 U34.10 U34.11 U36.8
!RST: R1.1 R8.1 U1.5
!RST1: R13.1 R19.1 U4.5
!RST2: R25.1 R31.1 U7.5
!RST3: R37.1 R43.1 U10.5
!RST4: R49.1 R55.1 U13.5
!RST5: R61.1 R67.1 U16.5
!RST6: R73.1 R79.1 U19.5
!RST7: R85.1 R91.1 U22.5
!RST8: R97.1 R103.1 U25.5
!RST9: R109.1 R115.1 U28.5
!RST10: R121.1 R127.1 U31.5
!RST11: R133.1 R139.1 U34.5
!SEN: R2.1 R7.1 U1.6
!SEN1: R14.1 R20.1 U4.6
!SEN2: R26.1 R32.1 U7.6
!SEN3: R38.1 R44.1 U10.6
!SEN4: R50.1 R56.1 U13.6
!SEN5: R62.1 R68.1 U16.6
!SEN6: R74.1 R80.1 U19.6
!SEN7: R86.1 R92.1 U22.6
!SEN8: R98.1 R104.1 U25.6
!SEN9: R110.1 R116.1 U28.6
!SEN10: R122.1 R128.1 U31.6
!SEN11: R134.1 R140.1 U34.6
GND: C1.2 C2.2 C5.1 C6.1 C10.2 C11.2 D1.2 D1.3 J3.7 J4.1 JP3.2 L1.2 U1.3 U1.4 U1.12 U1.15 U1.16 U1.21 U3.4 U3.5
GND1: C12.2 C13.2 C16.1 C17.1 C21.2 C22.2 D2.2 D2.3 J1.7 J2.1 JP8.2 L4.2 U4.3 U4.4 U4.12 U4.15 U4.16 U4.21 U6.4 U6.5
GND2: C23.2 C24.2 C27.1 C28.1 C32.2 C33.2 D3.2 D3.3 J5.7 J6.1 JP13.2 L7.2 U7.3 U7.4 U7.12 U7.15 U7.16 U7.21 U9.4 U9.5
GND3: C34.2 C35.2 C38.1 C39.1 C43.2 C44.2 D4.2 D4.3 J7.7 J8.1 JP18.2 L10.2 U10.3 U10.4 U10.12 U10.15 U10.16 U10.21 U12.4 U12.5
GND4: C45.2 C46.2 C49.1 C50.1 C54.2 C55.2 D5.2 D5.3 J9.7 J10.1 JP23.2 L13.2 U13.3 U13.4 U13.12 U13.15 U13.16 U13.21 U15.4 U15.5
GND5: C56.2 C57.2 C60.1 C61.1 C65.2 C66.2 D6.2 D6.3 J11.7 J12.1 JP28.2 L16.2 U16.3 U16.4 U16.12 U16.15 U16.16 U16.21 U18.4 U18.5
GND6: C67.2 C68.2 C71.1 C72.1 C76.2 C77.2 D7.2 D7.3 J13.7 J14.1 JP33.2 L19.2 U19.3 U19.4 U19.12 U19.15 U19.16 U19.21 U21.4 U21.5
GND7: C78.2 C79.2 C82.1 C83.1 C87.2 C88.2 D8.2 D8.3 J15.7 J16.1 JP38.2 L22.2 U22.3 U22.4 U22.12 U22.15 U22.16 U22.21 U24.4 U24.5
GND8: C89.2 C90.2 C93.1 C94.1 C98.2 C99.2 D9.2 D9.3 J17.7 J18.1 JP43.2 L25.2 U25.3 U25.4 U25.12 U25.15 U25.16 U25.21 U27.4 U27.5
GND9: C100.2 C101.2 C104.1 C105.1 C109.2 C110.2 D10.2 D10.3 J19.7 J20.1 JP48.2 L28.2 U28.3 U28.4 U28.12 U28.15 U28.16 U28.21 U30.4 U30.5
GND10: C111.2 C112.2 C115.1 C116.1 C120.2 C121.2 D11.2 D11.3 J21.7 J22.1 JP53.2 L31.2 U31.3 U31.4 U31.12 U31.15 U31.16 U31.21 U33.4 U33.5
GND11: C122.2 C123.2 C126.1 C127.1 C131.2 C132.2 D12.2 D12.3 J23.7 J24.1 JP58.2 L34.2 U34.3 U34.4 U34.12 U34.15 U34.16 U34.21 U36.4 U36.5
GPO1: J3.2 U1.19
GPO2: J3.1 U1.18
GPO3: J1.2 U4.19
GPO4: J1.1 U4.18
GPO5: J5.2 U7.19
GPO6: J5.1 U7.18
GPO7: J7.2 U10.19
GPO8: J7.1 U10.18
GPO9: J9.2 U13.19
GPO10: J9.1 U13.18
GPO11: J11.2 U16.19
GPO12: J11.1 U16.18
GPO13: J13.2 U19.19
GPO14: J13.1 U19.18
GPO15: J15.2 U22.19
GPO16: J15.1 U22.18
GPO17: J17.2 U25.19
GPO18: J17.1 U25.18
GPO19: J19.2 U28.19
GPO20: J19.1 U28.18
GPO21: J21.2 U31.19
GPO22: J21.1 U31.18
GPO23: J23.2 U34.19
GPO24: J23.1 U34.18
J1: C7.2 D1.1 SJ2.2
J2: C18.2 D2.1 SJ1.2
J3: C29.2 D3.1 SJ3.2
J4: C40.2 D4.1 SJ4.2
J5: C51.2 D5.1 SJ5.2
J6: C62.2 D6.1 SJ6.2
J7: C73.2 D7.1 SJ7.2
J8: C84.2 D8.1 SJ8.2
J9: C95.2 D9.1 SJ9.2
J10: C106.2 D10.1 SJ10.2
J11: C117.2 D11.1 SJ11.2
J12: C128.2 D12.1 SJ12.2
LA: JP3.3 L3.2 U2.TIP
LA1: JP8.3 L6.2 U5.TIP
LA2: JP13.3 L9.2 U8.TIP
LA3: JP18.3 L12.2 U11.TIP
LA4: JP23.3 L15.2 U14.TIP
LA5: JP28.3 L18.2 U17.TIP
LA6: JP33.3 L21.2 U20.TIP
LA7: JP38.3 L24.2 U23.TIP
LA8: JP43.3 L27.2 U26.TIP
LA9: JP48.3 L30.2 U29.TIP
LA10: JP53.3 L33.2 U32.TIP
LA11: JP58.3 L36.2 U35.TIP
LOUT: C4.1 U1.14
LOUT1: C15.1 U4.14
LOUT2: C26.1 U7.14
LOUT3: C37.1 U10.14
LOUT4: C48.1 U13.14
LOUT5: C59.1 U16.14
LOUT6: C70.1 U19.14
LOUT7: C81.1 U22.14
LOUT8: C92.1 U25.14
LOUT9: C103.1 U28.14
LOUT10: C114.1 U31.14
LOUT11: C125.1 U34.14
N$2: C14.2 R21.2
N$3: C3.2 R9.2
N$4: C4.2 R10.2
N$5: C15.2 R22.2
N$6: C6.2 U1.17 Y1.X1
N$7: SJ2.1 U2.SLEEVE
N$8: C7.1 L1.1 U1.2
N$9: J4.2 SJ2.3
N$10: R9.1 R12.2 U3.2
N$11: R10.1 R11.2 U3.6
N$12: C10.1 U3.3
N$13: C8.C L2.1
N$14: C9.C L3.1
N$15: C8.A R12.1 U3.1
N$16: C9.A R11.1 U3.7
N$17: C17.2 U4.17 Y2.X1
N$18: C18.1 L4.1 U4.2
N$19: SJ1.1 U5.SLEEVE
N$20: J2.2 SJ1.3
N$21: R21.1 R24.2 U6.2
N$22: R22.1 R23.2 U6.6
N$23: C21.1 U6.3
N$24: C19.C L5.1
N$25: C20.C L6.1
N$26: C19.A R24.1 U6.1
N$27: C20.A R23.1 U6.7
N$29: C25.2 R33.2
N$30: C26.2 R34.2
N$31: C28.2 U7.17 Y3.X1
N$32: C29.1 L7.1 U7.2
N$33: SJ3.1 U8.SLEEVE
N$34: J6.2 SJ3.3
N$35: R33.1 R36.2 U9.2
N$36: R34.1 R35.2 U9.6
N$37: C32.1 U9.3
N$38: C30.C L8.1
N$39: C31.C L9.1
N$40: C30.A R36.1 U9.1
N$41: C31.A R35.1 U9.7
N$43: C36.2 R45.2
N$44: C37.2 R46.2
N$45: C39.2 U10.17 Y4.X1
N$46: C40.1 L10.1 U10.2
N$47: SJ4.1 U11.SLEEVE
N$48: J8.2 SJ4.3
N$49: R45.1 R48.2 U12.2
N$50: R46.1 R47.2 U12.6
N$51: C43.1 U12.3
N$52: C41.C L11.1
N$53: C42.C L12.1
N$54: C41.A R48.1 U12.1
N$55: C42.A R47.1 U12.7
N$57: C47.2 R57.2
N$58: C48.2 R58.2
N$59: C50.2 U13.17 Y5.X1
N$60: C51.1 L13.1 U13.2
N$61: SJ5.1 U14.SLEEVE
N$62: J10.2 SJ5.3
N$63: R57.1 R60.2 U15.2
N$64: R58.1 R59.2 U15.6
N$65: C54.1 U15.3
N$66: C52.C L14.1
N$67: C53.C L15.1
N$68: C52.A R60.1 U15.1
N$69: C53.A R59.1 U15.7
N$71: C58.2 R69.2
N$72: C59.2 R70.2
N$73: C61.2 U16.17 Y6.X1
N$74: C62.1 L16.1 U16.2
N$75: SJ6.1 U17.SLEEVE
N$76: J12.2 SJ6.3
N$77: R69.1 R72.2 U18.2
N$78: R70.1 R71.2 U18.6
N$79: C65.1 U18.3
N$80: C63.C L17.1
N$81: C64.C L18.1
N$82: C63.A R72.1 U18.1
N$83: C64.A R71.1 U18.7
N$85: C69.2 R81.2
N$86: C70.2 R82.2
N$87: C72.2 U19.17 Y7.X1
N$88: C73.1 L19.1 U19.2
N$89: SJ7.1 U20.SLEEVE
N$90: J14.2 SJ7.3
N$91: R81.1 R84.2 U21.2
N$92: R82.1 R83.2 U21.6
N$93: C76.1 U21.3
N$94: C74.C L20.1
N$95: C75.C L21.1
N$96: C74.A R84.1 U21.1
N$97: C75.A R83.1 U21.7
N$99: C80.2 R93.2
N$100: C81.2 R94.2
N$101: C83.2 U22.17 Y8.X1
N$102: C84.1 L22.1 U22.2
N$103: SJ8.1 U23.SLEEVE
N$104: J16.2 SJ8.3
N$105: R93.1 R96.2 U24.2
N$106: R94.1 R95.2 U24.6
N$107: C87.1 U24.3
N$108: C85.C L23.1
N$109: C86.C L24.1
N$110: C85.A R96.1 U24.1
N$111: C86.A R95.1 U24.7
N$113: C91.2 R105.2
N$114: C92.2 R106.2
N$115: C94.2 U25.17 Y9.X1
N$116: C95.1 L25.1 U25.2
N$117: SJ9.1 U26.SLEEVE
N$118: J18.2 SJ9.3
N$119: R105.1 R108.2 U27.2
N$120: R106.1 R107.2 U27.6
N$121: C98.1 U27.3
N$122: C96.C L26.1
N$123: C97.C L27.1
N$124: C96.A R108.1 U27.1
N$125: C97.A R107.1 U27.7
N$127: C102.2 R117.2
N$128: C103.2 R118.2
N$129: C105.2 U28.17 Y10.X1
N$130: C106.1 L28.1 U28.2
N$131: SJ10.1 U29.SLEEVE
N$132: J20.2 SJ10.3
N$133: R117.1 R120.2 U30.2
N$134: R118.1 R119.2 U30.6
N$135: C109.1 U30.3
N$136: C107.C L29.1
N$137: C108.C L30.1
N$138: C107.A R120.1 U30.1
N$139: C108.A R119.1 U30.7
N$141: C113.2 R129.2
N$142: C114.2 R130.2
N$143: C116.2 U31.17 Y11.X1
N$144: C117.1 L31.1 U31.2
N$145: SJ11.1 U32.SLEEVE
N$146: J22.2 SJ11.3
N$147: R129.1 R132.2 U33.2
N$148: R130.1 R131.2 U33.6
N$149: C120.1 U33.3
N$150: C118.C L32.1
N$151: C119.C L33.1
N$152: C118.A R132.1 U33.1
N$153: C119.A R131.1 U33.7
N$155: C124.2 R141.2
N$156: C125.2 R142.2
N$157: C127.2 U34.17 Y12.X1
N$158: C128.1 L34.1 U34.2
N$159: SJ12.1 U35.SLEEVE
N$160: J24.2 SJ12.3
N$161: R141.1 R144.2 U36.2
N$162: R142.1 R143.2 U36.6
N$163: C131.1 U36.3
N$164: C129.C L35.1
N$165: C130.C L36.1
N$166: C129.A R144.1 U36.1
N$167: C130.A R143.1 U36.7
RA: JP3.1 L2.2 U2.RING
RA1: JP8.1 L5.2 U5.RING
RA2: JP13.1 L8.2 U8.RING
RA3: JP18.1 L11.2 U11.RING
RA4: JP23.1 L14.2 U14.RING
RA5: JP28.1 L17.2 U17.RING
RA6: JP33.1 L20.2 U20.RING
RA7: JP38.1 L23.2 U23.RING
RA8: JP43.1 L26.2 U26.RING
RA9: JP48.1 L29.2 U29.RING
RA10: JP53.1 L32.2 U32.RING
RA11: JP58.1 L35.2 U35.RING
RCLK: C5.2 U1.9 Y1.X2
RCLK1: C16.2 U4.9 Y2.X2
RCLK2: C27.2 U7.9 Y3.X2
RCLK3: C38.2 U10.9 Y4.X2
RCLK4: C49.2 U13.9 Y5.X2
RCLK5: C60.2 U16.9 Y6.X2
RCLK6: C71.2 U19.9 Y7.X2
RCLK7: C82.2 U22.9 Y8.X2
RCLK8: C93.2 U25.9 Y9.X2
RCLK9: C104.2 U28.9 Y10.X2
RCLK10: C115.2 U31.9 Y11.X2
RCLK11: C126.2 U34.9 Y12.X2
ROUT: C3.1 U1.13
ROUT1: C14.1 U4.13
ROUT2: C25.1 U7.13
ROUT3: C36.1 U10.13
ROUT4: C47.1 U13.13
ROUT5: C58.1 U16.13
ROUT6: C69.1 U19.13
ROUT7: C80.1 U22.13
ROUT8: C91.1 U25.13
ROUT9: C102.1 U28.13
ROUT10: C113.1 U31.13
ROUT11: C124.1 U34.13
RST-O: J3.3 R1.2
RST-O1: J1.3 R13.2
RST-O2: J5.3 R25.2
RST-O3: J7.3 R37.2
RST-O4: J9.3 R49.2
RST-O5: J11.3 R61.2
RST-O6: J13.3 R73.2
RST-O7: J15.3 R85.2
RST-O8: J17.3 R97.2
RST-O9: J19.3 R109.2
RST-O10: J21.3 R121.2
RST-O11: J23.3 R133.2
SCLK: R3.1 R6.1 U1.7
SCLK1: R15.1 R18.1 U4.7
SCLK2: R27.1 R30.1 U7.7
SCLK3: R39.1 R42.1 U10.7
SCLK4: R51.1 R54.1 U13.7
SCLK5: R63.1 R66.1 U16.7
SCLK6: R75.1 R78.1 U19.7
SCLK7: R87.1 R90.1 U22.7
SCLK8: R99.1 R102.1 U25.7
SCLK9: R111.1 R114.1 U28.7
SCLK10: R123.1 R126.1 U31.7
SCLK11: R135.1 R138.1 U34.7
SCLK-O: J3.5 R3.2
SCLK-O1: J1.5 R15.2
SCLK-O2: J5.5 R27.2
SCLK-O3: J7.5 R39.2
SCLK-O4: J9.5 R51.2
SCLK-O5: J11.5 R63.2
SCLK-O6: J13.5 R75.2
SCLK-O7: J15.5 R87.2
SCLK-O8: J17.5 R99.2
SCLK-O9: J19.5 R111.2
SCLK-O10: J21.5 R123.2
SCLK-O11: J23.5 R135.2
SDIO: R4.1 R5.1 U1.8
SDIO1: R16.1 R17.1 U4.8
SDIO2: R28.1 R29.1 U7.8
SDIO3: R40.1 R41.1 U10.8
SDIO4: R52.1 R53.1 U13.8
SDIO5: R64.1 R65.1 U16.8
SDIO6: R76.1 R77.1 U19.8
SDIO7: R88.1 R89.1 U22.8
SDIO8: R100.1 R101.1 U25.8
SDIO9: R112.1 R113.1 U28.8
SDIO10: R124.1 R125.1 U31.8
SDIO11: R136.1 R137.1 U34.8
SDIO-O: J3.6 R4.2
SDIO-O1: J1.6 R16.2
SDIO-O2: J5.6 R28.2
SDIO-O3: J7.6 R40.2
SDIO-O4: J9.6 R52.2
SDIO-O5: J11.6 R64.2
SDIO-O6: J13.6 R76.2
SDIO-O7: J15.6 R88.2
SDIO-O8: J17.6 R100.2
SDIO-O9: J19.6 R112.2
SDIO-O10: J21.6 R124.2
SDIO-O11: J23.6 R136.2
SEN-O: J3.4 R2.2
SEN-O1: J1.4 R14.2
SEN-O2: J5.4 R26.2
SEN-O3: J7.4 R38.2
SEN-O4: J9.4 R50.2
SEN-O5: J11.4 R62.2
SEN-O6: J13.4 R74.2
SEN-O7: J15.4 R86.2
SEN-O8: J17.4 R98.2
SEN-O9: J19.4 R110.2
SEN-O10: J21.4 R122.2
SEN-O11: J23.4 R134.2